# Altium PCB 供电模块.PcbDoc
Units mil, origin at the board's own origin, x right, y up, seen from the top; angles counter-clockwise.
Board outline 1700.16 x 1145.03 mil, 2 copper layers (Top Layer, Bottom Layer); 12 components, 11 nets, 59 pads, 6 vias.
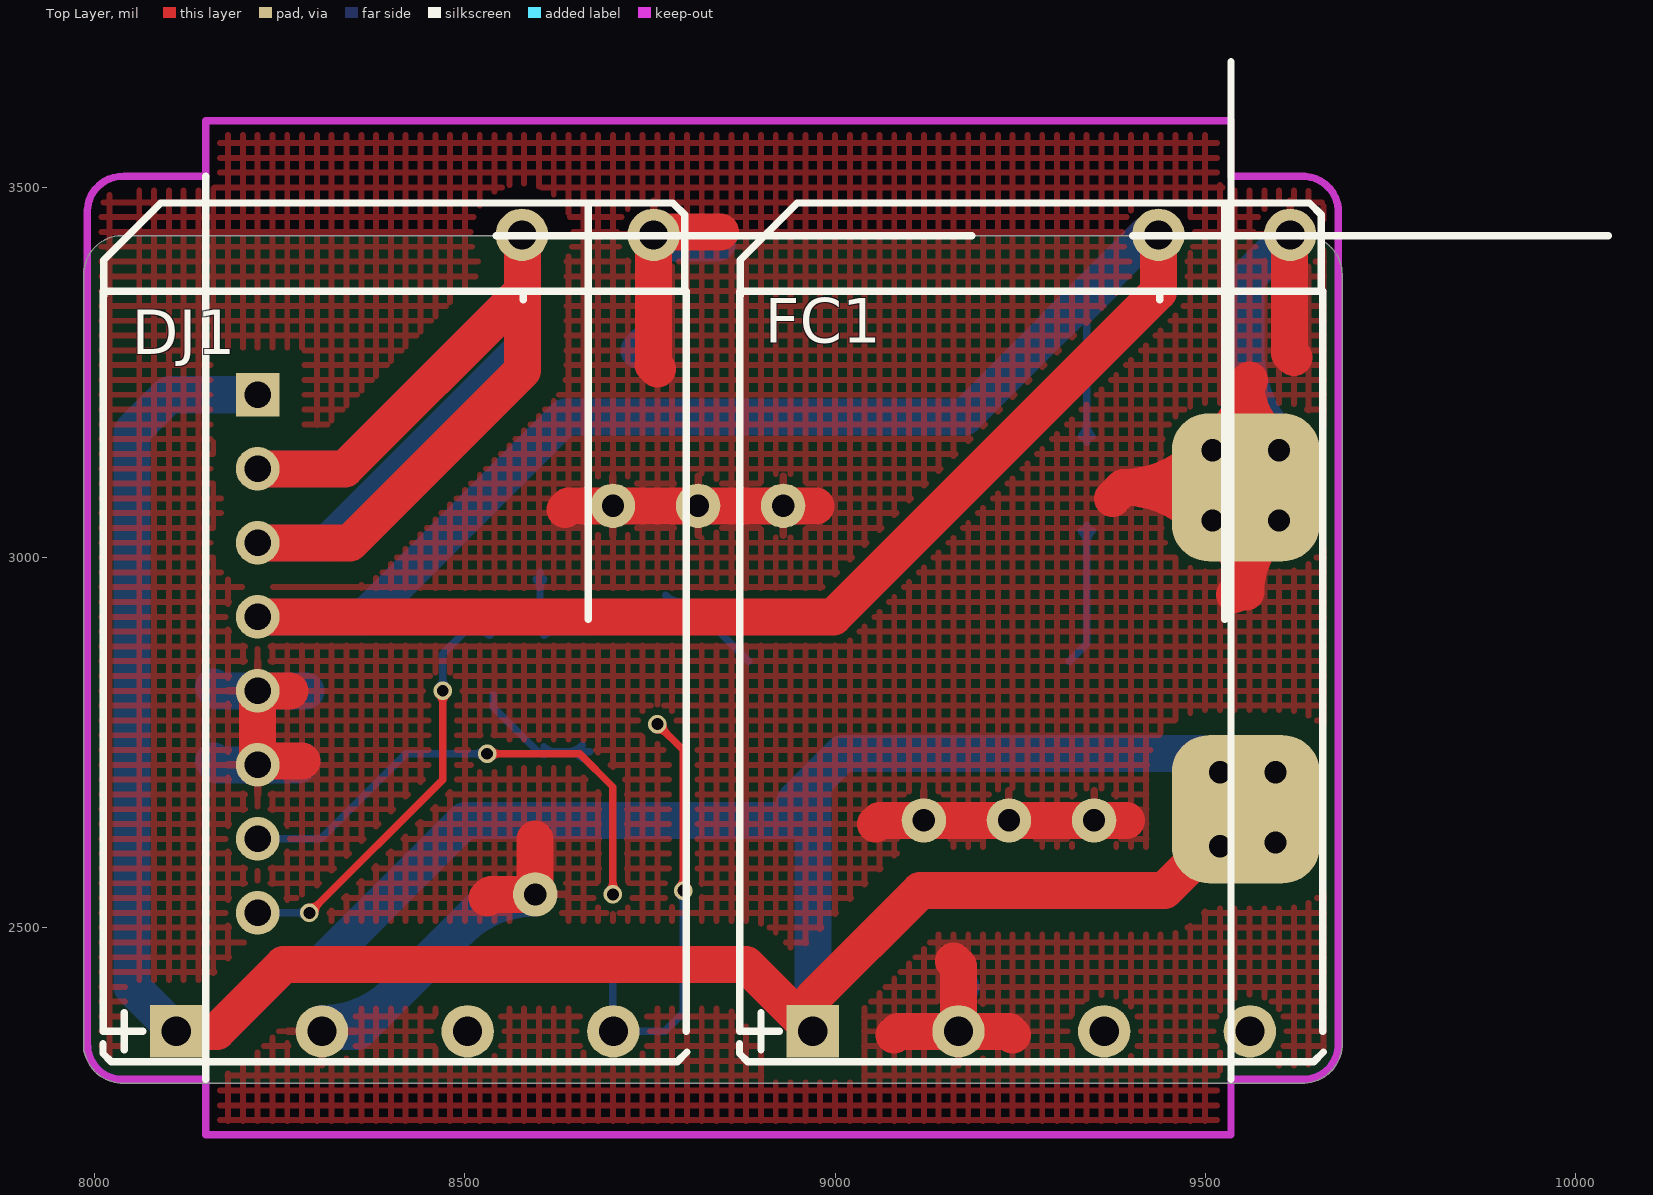
[diagram p0: Top Layer view]
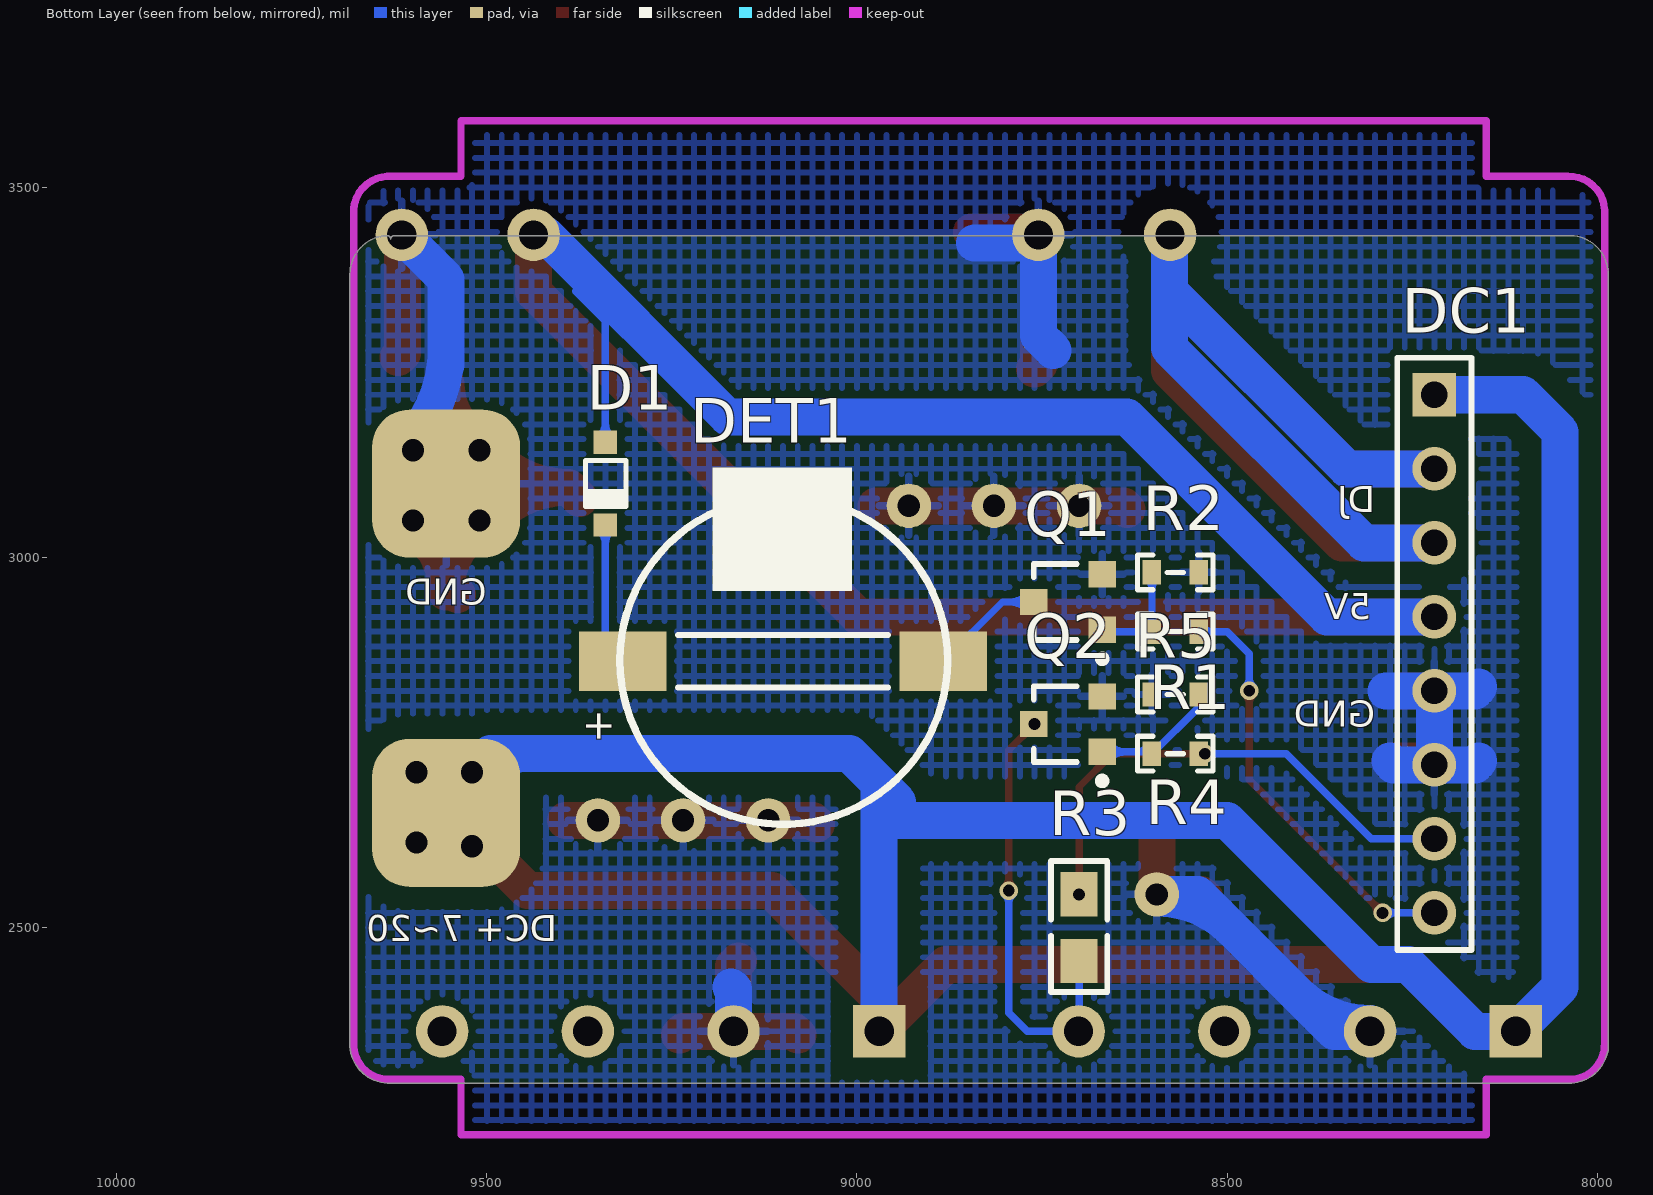
[diagram p1: Bottom Layer view, seen from below]

## Layer stack, top to bottom
Top Layer: signal copper 1.4
Dielectric: dielectric 12.6, FR-4, Dk 4.8
Bottom Layer: signal copper 1.4

## Board outline
7984.98,2335 ccw(c7990,2335) 7985.98,2332.01 ccw(c8037.5,2342.5) 8034.74,2289.99 ccw(c8035,2295) 8035,2289.99 9629.87,2289.99 ccw(c9632.5,2342.5) 9685.01,2339.74 ccw(c9680,2340) 9685.01,2340 9685.01,3379.87 ccw(c9632.5,3382.5) 9685.08,3382.5 ccw(c9632.5,3382.5) 9635.26,3435.01 ccw(c9635,3430) 9630,3430.39 ccw(c9625,3430) 9625,3435.01 8040.13,3435.01 ccw(c8037.5,3382.5) 7984.99,3385.26 ccw(c7990,3385) 7984.98,3385 7984.98,2345.13 ccw(c8037.5,2342.5) 7984.98,2339.87

## Design rules (kind name [scope] priority, off if disabled: settings)
Clearance Clearance_2 [InNet('VCC_DJ') vs (InPolygon)] p1: gap=30
Clearance Clearance_1 [InNet('POWER') vs (InPolygon)] p2: gap=30
Clearance [All] p3: gap=10
PolygonConnect [All] p1: connectstyle=Relief reliefconductorwidth=10 reliefentries=4 polygonreliefangle="90 Angle"
RoutingVias [All] p1: holewidth=28 width=50 viastyle="Through Hole" minholewidth=16 minwidth=25 maxholewidth=28 maxwidth=50
SilkscreenOverComponentPads [All] p1: minsilkscreentomaskgap=10
SolderMaskExpansion [All] p1: expansion=4
Width [All] p1: maxlimit=50 minlimit=10 preferedwidth=10 minimp=50.000000 maximp=50.000000 favimp=50.000000
27 further rules are at their usual default settings.

## Components (designator, comment, footprint, x,y, rotation, side; value= is the part's Value field where it differs from the comment)
D1 "BAT54WS" SOD-323 9340,3100 r90 bottom
DC1 "Header 8" HDR1X8 8220,3220 r270 bottom
DET1 "DET402_1" BEEP 9100,2860 r0 bottom
DJ1 "DCDC1" DCDC1 8110,2360 r90 top locked
FC1 "DCDC1" DCDC1 8970,2360 r90 top locked
Q1 "S8050" SOT-23R 8710,2940 r90 bottom
Q2 "S8050" SOT-23R 8710,2775 r90 bottom
R1 "1K" R0603 8570,2900 r180 bottom
R2 "10K" R0603 8570,2980 r0 bottom
R3 "NC" R0805 8700,2500 r270 bottom
R4 "1K" R0603 8570,2735 r180 bottom
R5 "10K" R0603 8570,2815 r180 bottom

## Footprints (in the part's own frame and the unit in brackets; to place one, negate y for a bottom-side part, rotate by r counter-clockwise, add the part's x,y. Pads: shape width x height; smd on the part's side, far side on the other; paste and mask are expansions set on the pad)
BEEP [mm] "Molded Capacitor, 2-Leads, Body 9.3x1.6mm, IPC Medium Density"
  rect 3x2.05 smd: 1(5.5,0) 2(-5.5,0)
  silkscreen extent -5.65,-6.65 5.6,5.59, body extent -4,-0.9 4,0.9, height 1.8
DCDC1 [mm]
  rect 1.8x1.8 hole 1: 1(0,0)
  round 1.8 hole 1: 2(0,-5) 3(0,-10) 4(0,-15) 5(27.33,-16.383) 6(27.33,-11.862)
  silkscreen extent -1.04,-27.3 28.42,2.51
HDR1X8 [mm] "Connector; Header; 8 Position"
  rect 1.5x1.5 hole 0.9: 1(0,0)
  round 1.5 hole 0.9: 2(2.54,0) 3(5.08,0) 4(7.62,0) 5(10.16,0) 6(12.7,0) 7(15.24,0) 8(17.78,0)
  silkscreen extent -1.27,-1.27 19.05,1.27
R0603 [mil] "ÌùÆ"
  rect 25x33 smd: 1(-31.5,0) 2(31.5,0)
  silkscreen extent -51,-24 51,24, body extent -32,-16 32,16, height 20
R0805 [mil]
  rect 60x50 smd: 1(45,0) 2(-45,0)
  silkscreen extent -90,-38 87,38, body extent -41,-24 38,25, height 31
SOD-323 [mm]
  rect 0.8x0.8 smd: 1(1.422,0) 2(-1.422,0)
  silkscreen extent -0.79,-0.74 0.79,0.69
SOT-23R [mm]
  rect 0.9x0.95 smd: 1(0.95,-1.048) 2(-0.95,-1.048) 3(0,1.302)
  silkscreen extent -2.07,-1.17 1.3,1.3

## Part data
D1: library part BAT54, "单肖特基二极管"
DC1: "Header, 8-Pin"
Q1 Q2: library part NPN, "8050/BCW846/BCW847"
R1 R2 R3 R4 R5: library part Res2, "0603"

## Free pads (board coordinates)
  round 60 hole 30: 0(9520,2710) 2(9595,2710) 3(9595,2615) 4(9520,2610) 5(9510,3145) 6(9600,3145) 7(9600,3050) 8(8595,2545) 8(8700,3070) 8(8815,3070) 8(8930,3070) 8(9120,2645) 8(9235,2645) 8(9350,2645) 8(9510,3050)
  rrect50% 200x200 smd far side: 0(9555,2655) 0(9555,3100)
  rrect50% 200x200 smd: 0(9555,2660) 0(9555,3095)

## Via types
v1: diameter 25, hole 16, Top Layer to Bottom Layer, 6 vias

## Nets (pads, with @x,y where several pads share a name; then routed paths per layer and width w, separated by ;. In a path a pad name is that pad's centre, name@x,y a point inside that pad or via, vN(x,y) a via of type N, cw(c..) or ccw(c..) an arc to the next point about the centre after c; other vN are vias at no path point)
5V: D1.1 DC1.4 FC1.6 | length 3167.9
  Top Layer w50: DC1.4 8998,2920 9437,3359 FC1.6
  Bottom Layer w10: D1.1@9332.4,3163.6 ccw(c9314.05,3181.95) 9340,3181.95 ccw(c9365.95,3181.95) D1.1@9347.6,3163.6 ; D1.1 9340,3320 9380,3360
  Bottom Layer w50: DC1.4 8365,2920 8635,3190 9175,3190 9421,3436 FC1.6
BEEP: DC1.8 R1.2 | length 724.8
  Top Layer w10: v1(8290,2520) 8470,2700 v1(8470,2820) ; v1@8290,2527.5 ccw(c8290,2545.61) 8302.8,2532.8 ccw(c8315.61,2520) v1@8297.5,2520 ; v1@8464.7,2814.7 cw(c8451.89,2801.89) 8470,2801.89 cw(c8488.11,2801.89) v1@8475.3,2814.7
  Bottom Layer w10: DC1.8 v1(8290,2520) ; v1@8284.7,2514.7 ccw(c8271.89,2501.89) 8271.89,2520 ccw(c8271.89,2538.11) v1@8284.7,2525.3 ; v1@8464.7,2825.3 ccw(c8451.89,2838.11) 8470,2838.11 ccw(c8488.11,2838.11) v1@8475.3,2825.3 ; v1(8470,2820) 8470,2870 8500,2900 R1.2 R1.2@8533.5,2895 ; R1.2@8533.2,2894.7 ccw(c8520.39,2881.89) 8520.39,2900 ccw(c8520.39,2918.11) R1.2@8533.2,2905.3
EN: DC1.7 R3.2 R4.2 | length 805
  Top Layer w10: v1(8530,2735) 8655,2735 8700,2690 v1(8700,2545) ; v1@8535.3,2729.7 cw(c8548.11,2716.89) 8548.11,2735 cw(c8548.11,2753.11) v1@8535.3,2740.3 ; v1@8694.7,2550.3 ccw(c8681.89,2563.11) 8700,2563.11 ccw(c8718.11,2563.11) v1@8705.3,2550.3
  Bottom Layer w10: DC1.7 8305,2620 8420,2735 v1(8530,2735) ; v1@8524.7,2729.7 ccw(c8511.89,2716.89) 8511.89,2735 ccw(c8511.89,2753.11) v1@8524.7,2740.3 ; R4.2@8533.2,2729.7 ccw(c8520.39,2716.89) 8520.39,2735 ccw(c8520.39,2753.11) R4.2@8533.2,2740.3
GND: DC1.5 DC1.6 DJ1.2 DJ1.5 FC1.2 FC1.5 pad.0@9555,3095 pad.0@9555,3100 pad.5 pad.6 pad.7 pad.8 Q1.1 Q2.1 R2.1 R5.1 | length 5480.5
  Top Layer w50: 8263.53,2820 DC1.5 DC1.6 8225,2725 8280,2725 ; 8530,2540 8535,2545 8595,2545 8595,2620 ; 8635,3065 8640,3070 8700,3070 8815,3070 8930,3070 8974,3070 ; DJ1.5@8749,3440 8845,3440 ; 8755,3337 DJ1.5 8755,3262 8754,3261 8760,3255 ; 9055,2640 9060,2645 9120,2645 9235,2645 9350,2645 9394,2645 ; 9080,2355 9085,2360 FC1.2 ; 9160,2455 9166.85,2448.15 FC1.2 ; 9240,2355 9235,2360 FC1.2 ; 9375,3080 9390,3095 ; pad.8@9498.49,3045.69 ccw(c9390.01,2951.02) 9390.01,3095 ; pad.5@9498.49,3144.31 cw(c9390.01,3238.98) 9390.01,3095 ; pad.5@9506.21,3148.26 cw(c9390.01,3248.4) 9390.01,3095 ; pad.8@9506.45,3046.48 ccw(c9390.01,2931.02) 9390.01,3095 ; pad.8@9507.13,3045.91 cw(c9442.51,2953.83) 9555,2953.83 cw(c9667.49,2953.83) pad.7@9602.87,3045.91 ; pad.5@9507.36,3149.25 ccw(c9454.01,3235) 9555,3235 ; pad.5@9508.56,3140.21 cw(c9489.75,3077.73) 9555,3077.73 cw(c9620.25,3077.73) pad.6@9601.44,3140.21 ; pad.0@9510,3095 cw(c9510,3050) pad.0@9541.95,3081.69 ; pad.5@9513.45,3157.44 ccw(c9461.84,3234.99) 9555,3234.99 ; pad.8@9517.46,3030.07 cw(c9479.84,2965) 9555,2965 ; 9540,2950 9555,2965 ; 9560,3240 9555,3235 ; pad.7@9592.54,3030.07 ccw(c9630.16,2965) 9555,2965 ; pad.6@9596.55,3157.44 cw(c9648.16,3234.99) 9555,3234.99 ; pad.6@9602.64,3149.25 cw(c9655.99,3235) 9555,3235 ; FC1.5 9614,3435 9614,3315 9614,3276 9620,3270 ; 9390,3095 pad.0@9555,3095 ; 9555,2965 pad.0@9555,3095 ; pad.0@9555,3095 9555,3235
  Bottom Layer w50: 8160,2725 8165,2720 DC1.6 ; 8160,2825 8165,2820 DC1.5 ; 8280,2725 8275,2720 DC1.6 ; 8285,2820 DC1.5 ; DJ1.2 8355,2360 8540,2545 pad.8@8595,2545 ; DJ1.2@8306.85,2370.43 ccw(c8306.85,2511.86) 8406.86,2411.86 ; 8492.57,2497.57 cw(c8595,2395.15) pad.8@8595,2540 ; 8512.5,2517.5 cw(c8573.21,2456.79) pad.8@8593.8,2540.15 ; 8735,3280 8755,3300 DJ1.5@8755,3430 ; DJ1.5 DJ1.5@8755,3430 ; 8841,3425 8760,3425 DJ1.5@8755,3430 ; FC1.2 9166.85,2416.85 9170,2420 ; 9555,3260 9555,3301 9555,3376 FC1.5 ; 9555,3281.07 ccw(c9736.07,3281.07) pad.6@9608.03,3153.03 ; DC1.6 DC1.5
NetD1_2: D1.2 DET1.1 | length 234.5
  Bottom Layer w10: DET1.1 9340,2883.46 D1.2 ; D1.2@9332.4,3036.4 cw(c9314.05,3018.05) 9340,3018.05 cw(c9365.95,3018.05) D1.2@9347.6,3036.4
NetDET1_2: DET1.2 Q1.3 | length 210.6
  Bottom Layer w10: Q1.3 8803.46,2940 DET1.2 DET1.2@8878.46,2865 ; Q1.3@8771.24,2931.01 cw(c8792.94,2909.3) 8792.94,2940 cw(c8792.94,2970.7) Q1.3@8771.24,2948.99
NetDJ1_4: DJ1.4 Q2.3 R3.1 | length 689.9
  Top Layer w10: v1@8760,2767.5 cw(c8760,2749.39) 8772.8,2762.2 cw(c8785.61,2775) v1@8767.5,2775 ; v1(8760,2775) 8795,2740 v1(8795,2550) ; v1@8789.7,2555.3 ccw(c8776.89,2568.11) 8795,2568.11 ccw(c8813.11,2568.11) v1@8800.3,2555.3
  Bottom Layer w10: R3.1 8700,2360.55 DJ1.4 8770,2360 8795,2385 v1(8795,2550) ; v1@8789.7,2544.7 cw(c8776.89,2531.89) 8795,2531.89 cw(c8813.11,2531.89) v1@8800.3,2544.7
NetQ1_2: Q1.2 R1.1 R2.2 | length 233.6
  Bottom Layer w10: R1.1@8596.2,2909.3 ccw(c8583.39,2922.11) 8601.5,2922.11 ccw(c8619.61,2922.11) R1.1@8606.8,2909.3 ; R2.2@8596.2,2970.7 cw(c8583.39,2957.89) 8601.5,2957.89 cw(c8619.61,2957.89) R2.2@8606.8,2970.7 ; R2.2 R1.1 8666.14,2900 Q1.2 ; R1.1@8606.8,2894.7 cw(c8619.61,2881.89) 8619.61,2900 cw(c8619.61,2918.11) R1.1@8606.8,2905.3
NetQ2_2: Q2.2 R4.1 R5.2 | length 251.1
  Bottom Layer w10: R5.2 8538.5,2798 R4.1 8604.1,2737.6 Q2.2 ; R4.1@8606.8,2733.7 cw(c8616.22,2724.28) 8616.22,2737.6 ; R4.1@8606.8,2744.3 ccw(c8622.99,2760.49) 8622.99,2737.6 ; Q2.2@8658.76,2728.61 ccw(c8637.06,2706.9) 8637.06,2737.6 ccw(c8637.06,2768.3) Q2.2@8658.76,2746.59
POWER: DC1.1 DJ1.1 FC1.1 pad.0@9520,2710 pad.0@9555,2655 pad.0@9555,2660 pad.2 pad.3 pad.4 | length 4780.5
  Top Layer w50: DJ1.1 8165,2360 8255,2450 8600,2450 8880,2450 FC1.1 8970,2405 9115,2550 9445,2550 pad.0@9555,2660 ; pad.0@9485.86,2590.86 cw(c9520,2556.72) pad.4@9520,2605 ; pad.4@9525,2610 cw(c9573.28,2610) pad.0@9539.14,2644.14
  Bottom Layer w50: DJ1.1@8115,2365 DJ1.1 ; DC1.1 8100,3220 8050,3170 8050,2420 DJ1.1 ; 8945,2670 8970,2695 ; FC1.1 8970,2645 ; 9447.57,2735 cw(c9447.57,2637.57) pad.0@9516.46,2706.46 ; pad.0@9520,2710 9495,2735 9010,2735 8970,2695 ; DJ1.1 8165,2360 8255,2450 8305,2450 8500,2645 8920,2645 8970,2645 ; 8970,2645 8970,2695
VCC_DJ: DC1.2 DC1.3 DJ1.6 | length 2173.1
  Top Layer w50: DC1.3 8345,3020 8578,3253 8578,3360 ; DC1.2 8338,3120 8578,3360 ; DJ1.6 8578,3435 8578,3360
  Bottom Layer w50: DC1.3 8315,3020 8578,3283 8578,3360 ; DC1.2 8338,3120 8578,3360 ; DJ1.6 8578,3435 8578,3360
pads on no net: DJ1.3 FC1.3 FC1.4

## Polygon pours and split planes (outlines as drawn)
GND on Bottom Layer "Top Layer-No Net" (hatched 90Degree grid 20 track 8, remove dead copper, pour order 1000): 7712.48,3607.15 7712.48,2047.71 7792.48,1952.47 7917.48,2101.27 9752.48,2101.27 9752.48,3523.82 9562.48,3750
GND on Top Layer "Top Layer-No Net" (hatched 90Degree grid 20 track 8, remove dead copper, pour order 1001): 7875.72,3650 7905.72,3617.9 7905.72,2194.71 9835.72,2194.71 9885.72,2248.21 9755.72,2387.32 9755.72,3607.2

## Keep-outs
Keep-Out Layer:
  lines w10: 7990,2335 7990,3470 cw(c8037.5,3467.5) 8040,3515 8150,3515 8150,3590 9535,3590 9535,3515 9635,3515 cw(c9632.5,3467.5) 9680,3465 9680,2340 cw(c9632.5,2342.5) 9630,2295 9535,2295 9535,2220 9445,2220 8150,2220 8150,2295 8035,2295 cw(c8037.5,2342.5) 7990,2345

## Silkscreen, mask and mechanical layers (free items; w line width, h text height)
Top Overlay:
  lines w10: 8150,2295 8150,3515 ; 9535,2295 9535,3670
Bottom Overlay:
  text "DJ" at 8300,3050 h60
  text "GND" at 9500,2925 h60
  text "5V" at 8305,2905 h60
  text "GND" at 8300,2760 h60
  text "DC+ 7~20" at 9405,2470 h60

## Text inside footprints (layer, text, board x,y; h text height)
DET1: Bottom Overlay "+" at 9366,2795 h40 r90